# Altium PCB PCB1.PcbDoc
Units mm, origin at the board's own origin, x right, y up, seen from the top; angles counter-clockwise.
Board outline 35 x 65 mm, 2 copper layers (Top Layer, Bottom Layer), stack 1.534 mm thick; 24 components, 19 nets, 118 pads, 132 vias.
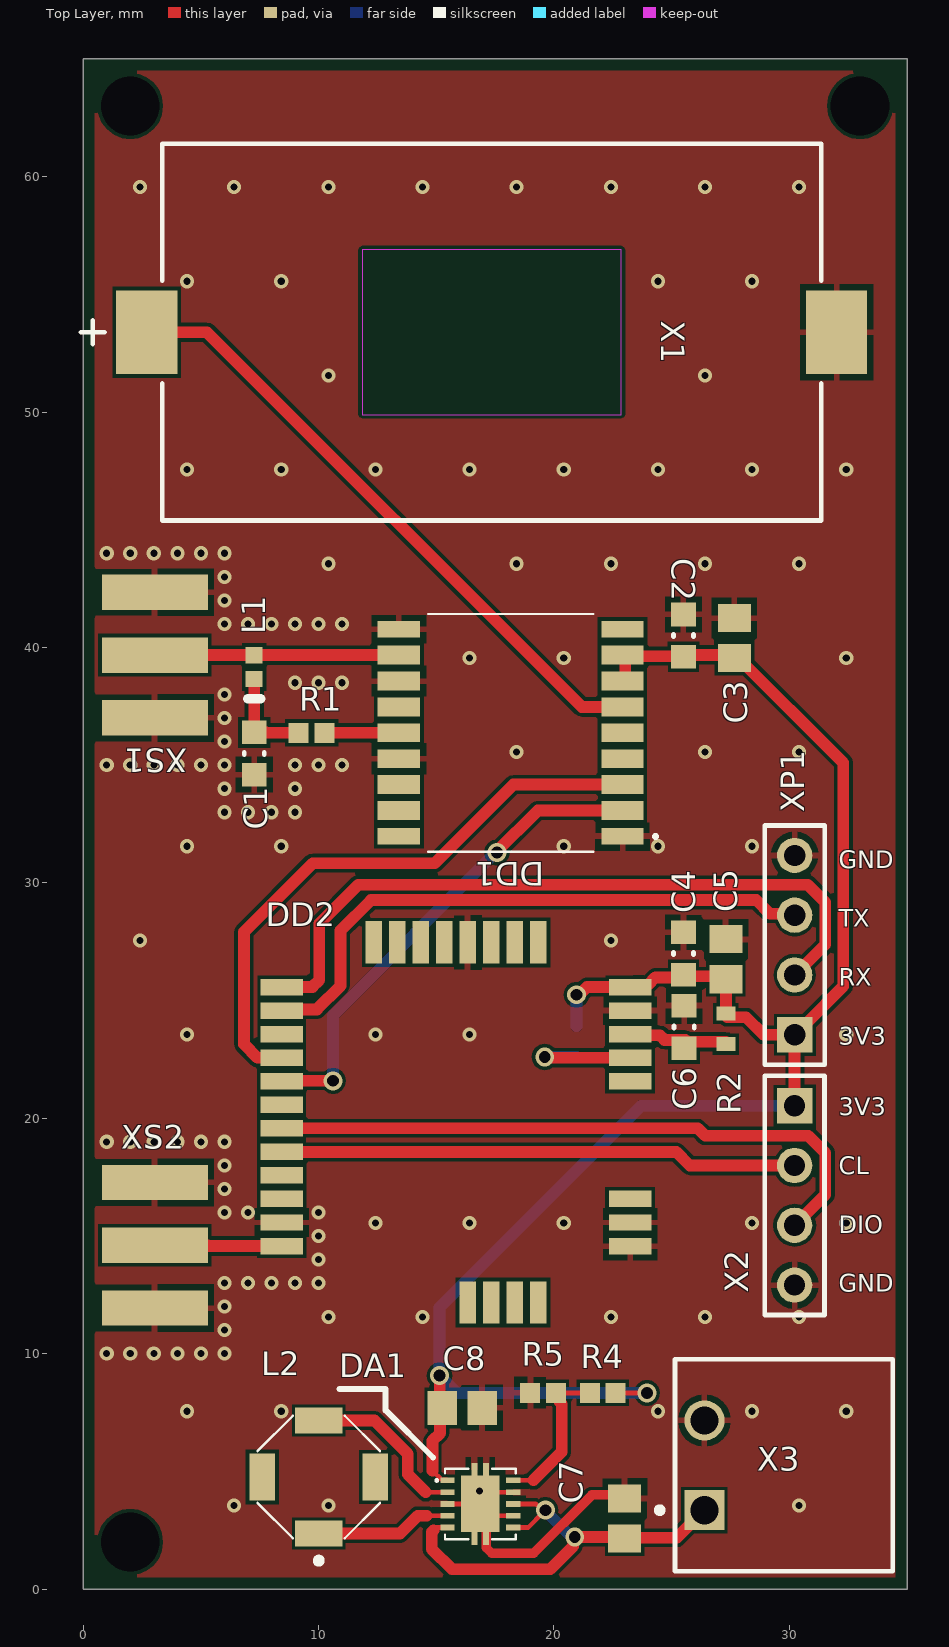
[diagram p0: Top Layer view]
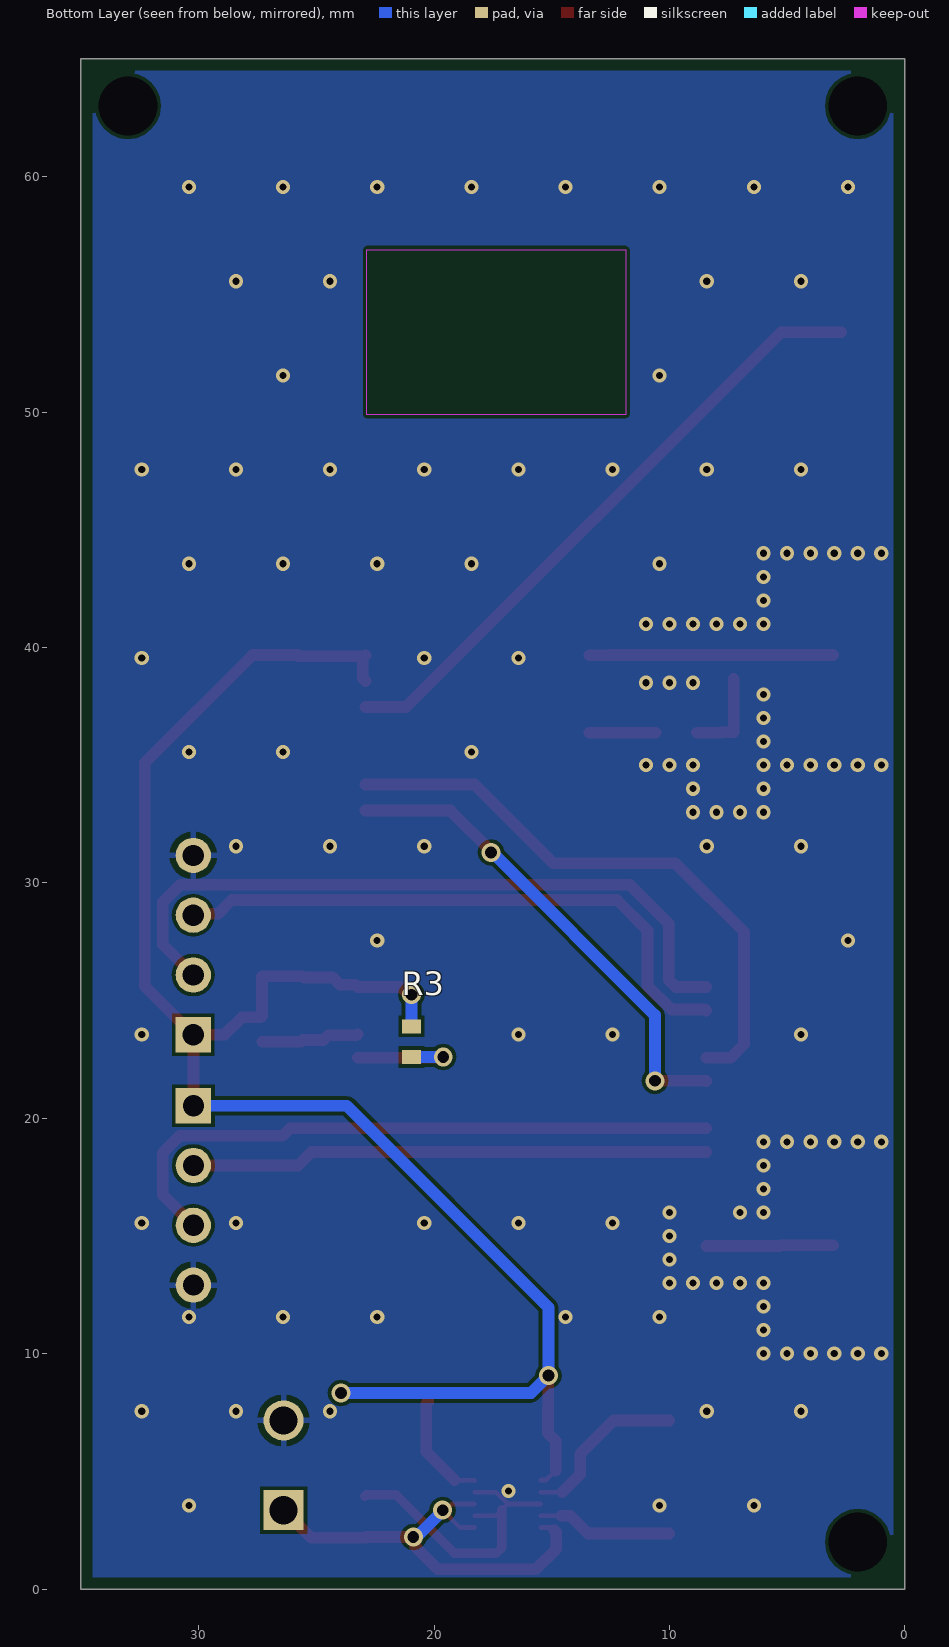
[diagram p1: Bottom Layer view, seen from below]
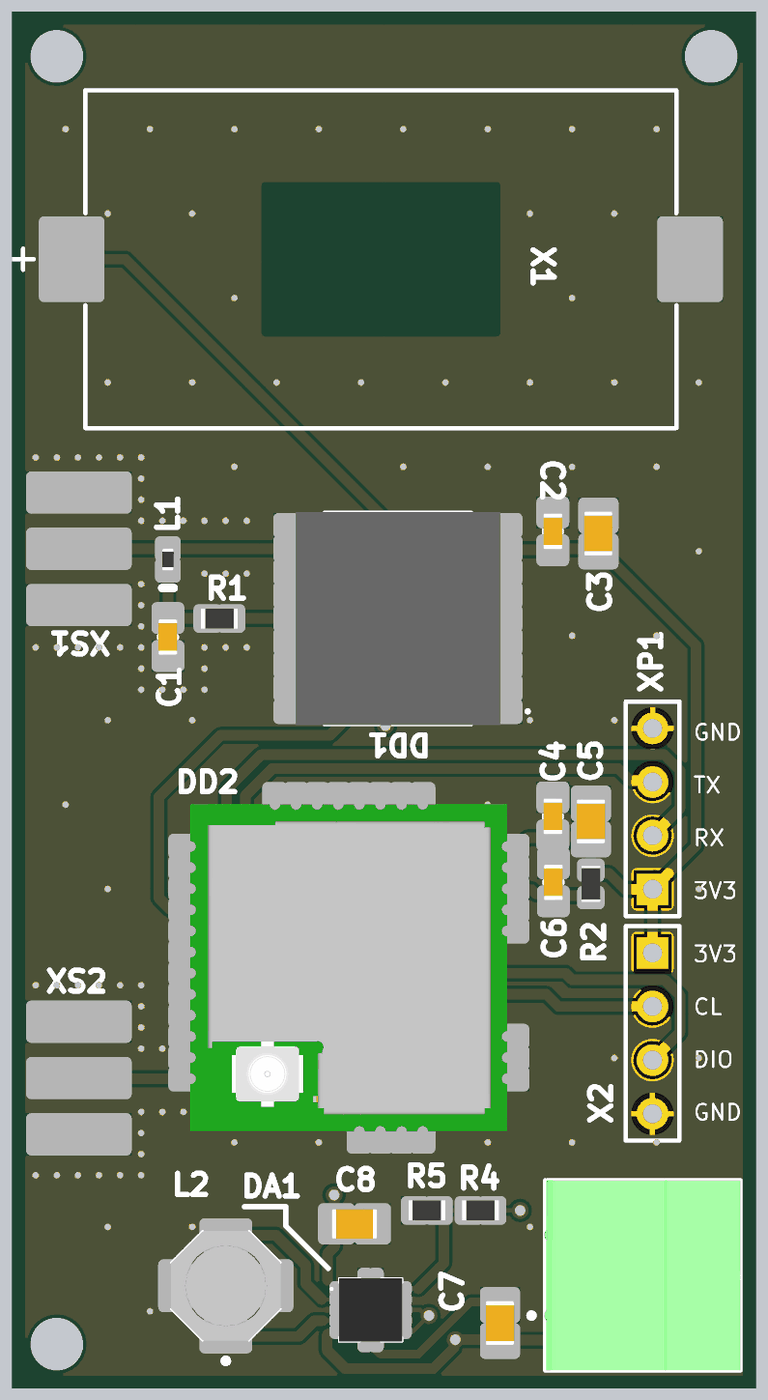
[diagram p2: 3D render of the assembled board from above, using the file's embedded part models]

## Layer stack, top to bottom
Top Solder: solder mask 0.0127, Solder Resist, Dk 3.3
Top Layer: signal copper 0.0178
Dielectric1: core 1.4986, FR-4, Dk 4.3
Bottom Layer: signal copper 0.0178
Bottom Solder: solder mask 0.0127, Solder Resist, Dk 3.3

## Board outline
0,0 35,0 35,65 0,65

## Design rules (kind name [scope] priority, off if disabled: settings)
Clearance [All] p1: gap=0.15 ignorepadtopadclearanceinfootprint=FALSE
ComponentClearance [All] p1: gap=0.25 collisioncheckmode=3 verticalgap=0.25 showdistances=FALSE
DiffPairsRouting [All] p1: maxlimit=0.25 minlimit=0.15 mostfreqgap=0.25 toplayer_minwidth=0.15 toplayer_maxwidth=0.254 toplayer_prefwidth=0.254 bottomlayer_minwidth=0.15 bottomlayer_maxwidth=0.254 bottomlayer_prefwidth=0.254 maxuncoupledlength=12.7
HoleSize [All] p1: absolutevalues=TRUE maxlimit=8 minlimit=0.3 maxpercent=80.000 minpercent=20.000
MinimumAnnularRing [All] p1: minimumring=0.254
PasteMaskExpansion [All] p1: expansion=0.254
PlaneClearance [All] p1: clearance=0.381
PlaneConnect [All] p1: pad.planeconnectstyle=Relief pad.reliefexpansion=0.508 pad.reliefentries=4 pad.reliefconductorwidth=0.254 pad.reliefairgap=0.254 via.planeconnectstyle=Direct via.reliefexpansion=0.508 via.reliefentries=4 via.reliefconductorwidth=0.254 via.reliefairgap=0.254
PolygonConnect [All] p1: thpad.connectstyle=Relief thpad.reliefconductorwidth=0.254 thpad.reliefentries=4 thpad.polygonreliefangle="90 Angle" thpad.airgapwidth=0.254 smdpad.connectstyle=Relief smdpad.reliefconductorwidth=0.254 smdpad.reliefentries=4 smdpad.polygonreliefangle="90 Angle" smdpad.airgapwidth=0.254 via.connectstyle=Direct via.reliefconductorwidth=0.254 via.reliefentries=4 via.polygonreliefangle="90 Angle" via.airgapwidth=0.254
RoomDefinition Sheet1 [InComponentClass('Sheet1')] p1: confinementstyle=ConfineIn formatcopy=TRUE lockcomponents=FALSE outline 0,0 35,0 35,65 0,65
RoutingCorners [All] p1: cornerstyle=45-Degree minsetback=2.5 maxsetback=2.5
RoutingVias [All] p1: holewidth=0.3 width=0.6 viastyle="Through Hole" minholewidth=0.3 minwidth=0.6 maxholewidth=0.5 maxwidth=0.8
SMDEntry [All] p1: side=TRUE corner=FALSE anyangle=FALSE
SMDNeckDown [All] p1: percent=100.000
SilkToSilkClearance [All] p1: silktosilkclearance=0.15
SilkToSolderMaskClearance SilkscreenOverComponentPads [IsPad] p1: minsilkscreentomaskgap=0.254 clearancetoexposedcopper=TRUE
SolderMaskExpansion [All] p1: expansion=0.254 istentingtop=FALSE
Width [All] p1: maxlimit=1 minlimit=0.15 preferedwidth=0.25 minimp=50.000000 maximp=50.000000 favimp=50.000000
21 further rules are at their usual default settings.

## Components (designator, comment, footprint, x,y, rotation, side; value= is the part's Value field where it differs from the comment)
C1 "GCM188R71H103KA37D" CAPC1608X09N 7.264,35.495 r270 top value=10nF
C2 "GCM188R71H104KA57D" CAPC1608X09N 25.5,40.5 r90 top value=100nF
C3 "CL21Y106KPQVPNE" CAPC2013X135X45NL10T25 27.661,40.4 r270 top value=10µF
C4 "GCM188R71H104KA57D" CAPC1608X09N 25.5,27 r270 top value=100nF
C5 "CL21Y106KPQVPNE" CAPC2013X135X45NL10T25 27.305,26.76 r270 top value=10µF
C6 "GCM188R71H104KA57D" CAPC1608X09N 25.527,23.875 r270 top value=100nF
C7 "CL21Y106KPQVPNE" CAPC2013X135X45NL10T25 23,3 r270 top value=10µF
C8 "C2012X5R1C226K125AC" CAPC2013X140X45NL15T25 16.104,7.696 r180 top value=22µF
DA1 "TPS63000IDRCRQ1" TPS63002DRCR 16.869,3.616 r0 top
DD1 "MAX-M8C-0" MAXM8C0 18.161,36.373 r0 top
DD2 "RAK3172(H)" RAK3172(H)-Footprint-1 23.336,12.072 r90 top
L1 "LQW15AN27NG00D" INDC1005X55X25ML5T10 7.264,39.168 r90 top value=27nH
L2 "SRU5018-3R5Y" SRU5018680Y 10.008,4.762 r270 top value=3.5µH
R1 "SG73P1JTTD100J" RESC1608X95X40LL15T20 9.703,36.373 r0 top value=10
R2 "RMCF0603FT10K0" RESC1608X55X25LL10T15 27.3,23.8 r90 top
R3 "RMCF0603ZT0R00" RESC1608X55X25LL10T15 20.955,23.256 r90 bottom value=0
R4 "RMCF0603JT1M00" RESC1608X95X40LL15T20 22.073,8.331 r0 top value=1M
R5 "ERJ-3EKF1783V" RESC1608X95X40LL15T20 19.533,8.331 r0 top value=178k
X1 "BA2032SM" MPD-BA2032SM_V 17.354,53.391 r0 top
X2 "ST-LINK-SWD-CONNECTOR" 20021311-00010T4LF-Footprint-1 30.222,20.533 r270 top
X3 "1803277" PHOE-1803277_V 26.391,5.258 r90 top
XP1 "61300411121" 20021311-00010T4LF-Footprint-1 30.226,23.546 r90 top
XS1 "CON-SMA-EDGE-S" RFSOLUTIONS_CON-SMA-EDGE-S 3.048,39.675 r90 top
XS2 "CON-SMA-EDGE-S" RFSOLUTIONS_CON-SMA-EDGE-S 3.048,14.605 r90 top

## Footprints (in the part's own frame and the unit in brackets; to place one, negate y for a bottom-side part, rotate by r counter-clockwise, add the part's x,y. Pads: shape width x height; smd on the part's side, far side on the other; paste and mask are expansions set on the pad)
20021311-00010T4LF-Footprint-1 [mm]
  rect 1.5x1.5 hole 0.9: 1(0,0)
  round 1.5 hole 0.9: 2(2.54,0) 3(5.08,0) 4(7.62,0)
  silkscreen extent -1.27,-1.27 8.89,1.27
CAPC1608X09N [mm] "Chip Capacitor, 2-Leads, Body 1,60x0,80mm, IPC Medium Density"
  rect 1x1.05 smd: 1(-0.9,0) 2(0.9,0)
  silkscreen extent -0.05,-0.43 0.05,0.43, body extent -0.85,-0.45 0.85,0.45, height 0.9
CAPC2013X135X45NL10T25 [mm] "Chip Capacitor, 2-Leads, Body 2.10x1.35mm, IPC Medium Density"
  rect 1.2x1.4 smd: 1(-0.85,0) 2(0.85,0)
  body extent -1.05,-0.67 1.05,0.67, height 1.35
CAPC2013X140X45NL15T25 [mm] "Chip Capacitor, 2-Leads, Body 2.15x1.4mm, IPC Medium Density"
  rect 1.25x1.45 smd: 1(-0.85,0) 2(0.85,0)
  body extent -1.07,-0.7 1.08,0.7, height 1.4
INDC1005X55X25ML5T10 [mm] "Chip Inductor, 2-Leads, Body 1.05x0.55mm, IPC Low Density"
  rect 0.69x0.72 smd: 1(-0.505,0) 2(0.505,0)
  silkscreen extent -1.35,-0.28 -1.35,0.28, body extent -0.53,-0.28 0.53,0.28, height 0.55
MAXM8C0 [mm]
  rect 1.8x0.7 smd: 1(4.75,-4.4) 9(4.75,4.4) 10(-4.75,4.4) 18(-4.75,-4.4)
  rect 1.8x0.8 smd: 2(4.75,-3.3) 3(4.75,-2.2) 4(4.75,-1.1) 5(4.75,0) 6(4.75,1.1) 7(4.75,2.2) 8(4.75,3.3) 11(-4.75,3.3) 12(-4.75,2.2) 13(-4.75,1.1) 14(-4.75,0) 15(-4.75,-1.1) 16(-4.75,-2.2) 17(-4.75,-3.3)
  silkscreen extent -3.5,-5.05 6.2,5.05, body extent -4.85,-5.05 4.85,5.05, height 2.8
MPD-BA2032SM_V [mm] "Coin Cell Holder, 2-Leads, Body 28x16mm"
  rect 2.6x3.56 smd: 1(-14.65,0) 2(14.65,0)
  Keep-Out Layer region: -5.5,-3.5 5.5,-3.5 5.5,3.5 -5.5,3.5
  silkscreen extent -17.45,-8 14,8, body extent -14,-8 14,8, height 6.7
PHOE-1803277_V [mm] "CONN, Body 9.2x9.01mm, Pitch 3.81mm"
  rect 1.7x1.7 hole 1.2: 1(-1.905,0)
  round 1.7 hole 1.2: 2(1.905,0)
  silkscreen extent -4.5,-8 4.5,2.02, body extent -4.51,-8 4.5,1.3, height 7.25
RAK3172(H)-Footprint-1 [mm]
  rect 0.7x1.8 smd: 1(13.5,14.9) 2(12.5,14.9) 3(11.5,14.9) 4(10.5,14.9) 5(9.5,14.9) 6(8.5,14.9) 7(7.5,14.9) 8(6.5,14.9) 9(5.5,14.9) 10(4.5,14.9) 11(3.5,14.9) 12(2.5,14.9) 17(2.5,0.1) 18(3.5,0.1) 19(4.5,0.1) 20(9.5,0.1) 21(10.5,0.1) 22(11.5,0.1) 23(12.5,0.1) 24(13.5,0.1)
  rect 1.8x0.7 smd: 13(0.1,7) 14(0.1,6) 15(0.1,5) 16(0.1,4) 25(15.4,4) 26(15.4,5) 27(15.4,6) 28(15.4,7) 29(15.4,8) 30(15.4,9) 31(15.4,10) 32(15.4,11)
  body extent 0,0 15.5,15, height 3.5
RESC1608X55X25LL10T15 [mm] "Chip Resistor, 2-Leads, Body 1.70x0.90mm, IPC High Density"
  rect 0.6x0.8 smd: 1(-0.65,0) 2(0.65,0)
  body extent -0.85,-0.45 0.85,0.45, height 0.55
RESC1608X95X40LL15T20 [mm] "Chip Resistor, 2-Leads, Body 1.75x0.95mm, IPC High Density"
  rect 0.85x0.85 smd: 1(-0.55,0) 2(0.55,0)
  body extent -0.87,-0.48 0.87,0.48, height 0.95
RFSOLUTIONS_CON-SMA-EDGE-S [mm] "CONN SMA JACK STR EDGE MNT"
  rect 1.5x4.5 smd: 1(0,0) 2(-2.667,0) 2(2.667,0)
  body extent -3.18,-1.52 3.17,11.63, height 3.55
SRU5018680Y [mm]
  rect 1.1x2 smd: 1(2.4,0) 2(-2.4,0)
  rect 2x1.1 smd: 3(0,-2.4) 4(0,2.4)
  silkscreen extent -2.6,-2.6 3.68,2.6, body extent -2.6,-2.6 2.6,2.6, height 1.8
TPS63002DRCR [mm]
  rect 0.6x0.24 smd: 1(-1.4,1) 2(-1.4,0.5) 3(-1.4,0) 4(-1.4,-0.5) 5(-1.4,-1) 6(1.4,-1) 7(1.4,-0.5) 8(1.4,0) 9(1.4,0.5) 10(1.4,1)
  rect 1.65x2.4 smd: 11(0,0)
  rect 0.25x0.6 smd: 12(0.25,1.45) 13(-0.25,1.45) 14(0.25,-1.45) 15(-0.25,-1.45)
  silkscreen extent -1.9,-1.5 1.5,1.5, body extent -1.5,-1.5 1.5,1.5, height 1

## Part data
C1: library part CMP-001-00124-4, "CAP CER 10000PF 50V X7R 0603", Case Code (Metric)=1608, Case/Package=0603, Dielectric=X7R, Manufacturer=Murata, Max Operating Temperature=125°C, Min Operating Temperature=-55°C, Package Quantity=1, Ratings=AEC-Q200, Tolerance=10%, Voltage=50V, ComponentLink1Description=https://datasheet.ciiva.com/16624/product-16624561.pdf?src-supplier=Avnet+Europe, ComponentLink1URL=https://datasheet.ciiva.com/16624/product-16624561.pdf?src-supplier=Avnet+Europe, ComponentLink2Description=https://datasheet.ciiva.com/132/product-132006.pdf?src-supplier=Digi-Key, ComponentLink2URL=https://datasheet.ciiva.com/132/product-132006.pdf?src-supplier=Digi-Key, ComponentLink3Description=https://datasheet.ciiva.com/11789/0900766b80ef92d0-11789046.pdf?src-supplier=RSComponents, ComponentLink3URL=https://datasheet.ciiva.com/11789/0900766b80ef92d0-11789046.pdf?src-supplier=RSComponents, ComponentLink4Description=https://datasheet.ciiva.com/18183/getdatasheetpartid-178897-18183622.pdf?src-supplier=Verical, ComponentLink4URL=https://datasheet.ciiva.com/18183/getdatasheetpartid-178897-18183622.pdf?src-supplier=Verical, ComponentLink5Description=https://datasheet.ciiva.com/132/product-132007.pdf?src-supplier=Digi-Key, ComponentLink5URL=https://datasheet.ciiva.com/132/product-132007.pdf?src-supplier=Digi-Key, ComponentLink6Description=https://datasheet.ciiva.com/16213/s0717e-16213899.pdf?src-supplier=Future+Electronics, ComponentLink6URL=https://datasheet.ciiva.com/16213/s0717e-16213899.pdf?src-supplier=Future+Electronics, Construction=Flat, Depth=0.8mm, Design Item ID=1_7, Height=0.8mm, Lead Free="Lead Free", Length=1.6mm, Lybrary Path=Capacitors.SchLib, Manufacturer Part Number=GCM188R71H103KA37D, Mount="Surface Mount", Packaging="Tape and Reel", Pricing 1="1=0,17000, 10=0,11900, 50=0,06740, 100=0,05580, 500=0,03912, 1000=0,03239 (USD)", Radiation Hardening=No, REACH SVHC="No SVHC", RoHS=Yes, RoHS Compliant=Yes, Series=GCM, Source=Meteo_1.SCHLIB, Stock 1=4826468, Termination=SMD/SMT, Thickness=0.035inch, Voltage Rating=50V, Voltage Rating (DC)=50V, Width=0.031inch
C2 C4 C6: library part CMP-001-00128-5, "CAP CER 0.1UF 50V X7R 0603", Case Code (Metric)=1608, Case/Package=0603, Color=Grey, Dielectric=X7R, Manufacturer=Murata, Max Operating Temperature=125°C, Min Operating Temperature=-55°C, Package Quantity=1, Ratings=AEC-Q200, Tolerance=10%, Voltage=50V, Approvals=CSA,UR, ComponentLink1Description=https://datasheet.ciiva.com/16624/product-16624562.pdf?src-supplier=Avnet+Europe, ComponentLink1URL=https://datasheet.ciiva.com/16624/product-16624562.pdf?src-supplier=Avnet+Europe, ComponentLink2Description=https://datasheet.ciiva.com/133/product-133574.pdf?src-supplier=Digi-Key, ComponentLink2URL=https://datasheet.ciiva.com/133/product-133574.pdf?src-supplier=Digi-Key, ComponentLink3Description=https://datasheet.ciiva.com/133/product-133575.pdf?src-supplier=Digi-Key, ComponentLink3URL=https://datasheet.ciiva.com/133/product-133575.pdf?src-supplier=Digi-Key, ComponentLink4Description=https://datasheet.ciiva.com/18183/getdatasheetpartid-98693-18183626.pdf?src-supplier=Verical, ComponentLink4URL=https://datasheet.ciiva.com/18183/getdatasheetpartid-98693-18183626.pdf?src-supplier=Verical, ComponentLink5Description=https://datasheet.ciiva.com/11786/0900766b80ef92d0-11786863.pdf?src-supplier=RSComponents, ComponentLink5URL=https://datasheet.ciiva.com/11786/0900766b80ef92d0-11786863.pdf?src-supplier=RSComponents, ComponentLink6Description=https://datasheet.ciiva.com/133/product-133573.pdf?src-supplier=Digi-Key, ComponentLink6URL=https://datasheet.ciiva.com/133/product-133573.pdf?src-supplier=Digi-Key, ComponentLink7Description=https://datasheet.ciiva.com/2989/product-2989242.pdf?src-supplier=Avnet, ComponentLink7URL=https://datasheet.ciiva.com/2989/product-2989242.pdf?src-supplier=Avnet, ComponentLink8Description=https://datasheet.ciiva.com/16497/product-16497247.pdf?src-supplier=Future+Electronics, ComponentLink8URL=https://datasheet.ciiva.com/16497/product-16497247.pdf?src-supplier=Future+Electronics, Construction=Flat, Depth=0.8mm, Design Item ID=1_16, Height=0.8mm, Lead Free="Lead Free", Length=1.6mm, Manufacturer Part Number=GCM188R71H104KA57D, Mount="Surface Mount", Packaging="Tape and Reel", Pricing 1="1=0,11000, 10=0,07900, 50=0,04280, 100=0,03500, 500=0,02502, 1000=0,01966 (USD)", Radiation Hardening=No, REACH SVHC="No SVHC", RoHS=Yes, RoHS Compliant=Yes, Series=GCM, Source=Meteo_1.SCHLIB, Stock 1=4755830, Termination=SMD/SMT, Thickness=0.035inch, Voltage Rating=50V, Voltage Rating (DC)=50V, Width=0.031inch
C3 C5 C7: library part CMP-001-00143-4, "CAP CER 10UF 10V X7S 0805", Capacitance=10µF, Case Code (Imperial)=0805, Case Code (Metric)=2012, Manufacturer=Samsung, Max Operating Temperature=125°C, Min Operating Temperature=-55°C, Ratings=AEC-Q200, Tolerance=10%, Voltage Rating=10V, Case/Package=0805, Features="Soft Termination", Lead Free="Lead Free", Length=0.079inch, Manufacturer Part Number=CL21Y106KPQVPNE, Mount="Surface Mount", Packaging="Tape and Reel", RoHS Compliant=Yes, Thickness=0.055inch, Width=0.049inch
C8: library part CMP-001-00144-1, "TDK - C2012X5R1C226K125AC - SMD Multilayer Ceramic Capacitor, 22 µF, 16 V, 0805 [2012 Metric], ± 10%, X5R, C Series", Capacitance=22uF, Case Code (Imperial)=0805, Case Code (Metric)=2012, Dielectric=X5R, Dielectric Material=Ceramic, Manufacturer=TDK, Max Operating Temperature=85°C, Min Operating Temperature=-55°C, Package Quantity=1, Tolerance=10%, Voltage=16V, Case/Package=0805, Construction=Flat, Depth=1.25mm, Height=1.25mm, Lead Free="Lead Free", Length=2mm, Manufacturer Part Number=C2012X5R1C226K125AC, Mount="Surface Mount", Number of Pins=2, Packaging="Tape and Reel", REACH SVHC="No SVHC", Resistor Type=Ceramic, RoHS Compliant=Yes, Series=C, Termination=Wraparound, Thickness=0.057inch, Voltage Rating=16V, Voltage Rating (DC)=16V, Weight=0.000194oz, Width=0.049inch
DA1: library part CMP-031-00015-3, "IC REG BUCK BOOST ADJ 1.6A 10SON", Case/Package=VSON, Manufacturer="Texas Instruments", Manufacturer Part Number=TPS63000DRCR, Max Input Voltage=5.5V, Max Operating Temperature=85°C, Max Output Current=1.2A, Min Input Voltage=1.8V, Min Operating Temperature=-40°C, Min Output Voltage=1.2V, Output Current=1.6A, Package Quantity=1, Quiescent Current=40uA, Switching Frequency=1.5MHz, Contact Plating=Gold, Efficiency=96%, Lead Free="Lead Free", Max Output Voltage=5.5V, Number of Outputs=1, Number of Pins=10, Operating Supply Voltage=5.5V, Output Configuration=Positive, Output Type=Adjustable, Output Voltage=5.5V, Packaging="Tape and Reel", RoHS Compliant=Yes, Series="Automotive, AEC-Q100", Synchronous Rectifier=Yes, Topology=Buck-Boost, Weight=0.000921oz, Width=3mm
DD1: library part CMP-021-00007-2, "IC Receiver Gps/gnss 18LCC", Manufacturer=u-blox, Manufacturer Part Number=MAX-M8C-0, RoHS Compliant=Yes
DD2: library part CMP-00025-00003-1, "RAK3172 WisDuo LPWAN Module", Manufacturer="RAK Wireless", Manufacturer Part Number=RAK3172(H)
L1: library part CMP-006-00036-2, "INDUCTOR", Case Code (Imperial)=0402, Case Code (Metric)=1005, Current=260mA, Current Rating=280mA, DC Resistance (DCR)=520mR, Inductance=27nH, Inductance Tolerance=2%, Manufacturer=Murata, Max Operating Temperature=125°C, Min Operating Temperature=-55°C, Package Quantity=1, Self Resonant Frequency=3.5GHz, Test Frequency=100MHz, Case/Package=0402, Core Material=Air,Ferrite, DC Current=280mA, Depth=0.6mm, Height=0.5mm, Lead Free="Lead Free", Length=1mm, Manufacturer Part Number=LQW15AN27NG00D, Max DC Current=280mA, Military Standard=Not, Mount="Surface Mount", Number of Pins=2, Packaging="Tape and Reel", Q Factor=25, Radiation Hardening=No, REACH SVHC="No SVHC", RoHS Compliant=Yes, Shielding=Unshielded, Termination=SMD/SMT, Tolerance=2%, Weight=2.8E-05oz, Width=0.5mm
L2: library part CMP-006-00039-2, "Ind Power Shielded Wirewound 3.5uH 30% 100KHz 9Q-Factor Ferrite 2.1A T/R", Case/Package=5018, Current Rating=2.1A, DC Resistance (DCR)=32mR, Inductance=3.5uH, Manufacturer=Bourns, Max Operating Temperature=125°C, Min Operating Temperature=-40°C, Package Quantity=1000, Saturation Current=1.7A, Self Resonant Frequency=90MHz, Test Frequency=100kHz, Tolerance=30%, Core Material=Ferrite, DC Current=2.1A, Depth=5.4mm, Height=1.8mm, Length=5.2mm, Manufacturer Part Number=SRU5018-3R5Y, Max DC Current=2.1A, Military Standard=Not, Mount="Surface Mount", Number of Pins=2, Packaging="Tape and Reel", Q Factor=9, RoHS Compliant=Yes, Series=SRU5018, Shielding=Shielded, Termination=SMD/SMT, Width=0.205inch
R1: library part CMP-00014-1, "Thick Film Resistors - SMD 0.2W 10ohm 5% 100ppm Anti-Pulse", Case Code (Imperial)=0603, Case Code (Metric)=1608, Max Operating Temperature=155°C, Min Operating Temperature=-55°C, Power Rating=200mW, Resistance=10, Resistor Type="Thick Film", Temperature Coefficient=100ppm/°C, Tolerance=5%, Voltage Rating=50V, Case/Package=0603, Component Comment="10 200mW", Height=0.45mm, Length=1.6mm, Packaging="Tape and Reel", RoHS Compliant=Yes, Series=SG73, Termination=SMD/SMT, Voltage Rating (DC)=50V, Weight=7.1E-05oz, Width=0.8mm
R2: library part CMP-009-00252-4, "RES SMD 10K OHM 1% 1/10W 0603", Case Code (Imperial)=0603, Case Code (Metric)=1608, Manufacturer="Stackpole Electronics Inc", Max Operating Temperature=155°C, Max Power Dissipation=100mW, Min Operating Temperature=-55°C, Resistance=10k, Resistor Type="Thick Film", Temperature Coefficient=100ppm/°C, Tolerance=1%, Voltage Rating=75V, Case/Package=0603, Component Comment="10k 100mW", Construction=Rectangular, Contact Plating=Tin,Matte, Depth=0.8mm, Features="Automotive AEC-Q200", Height=0.022inch, Lead Free="Lead Free", Length=1.55mm, Manufacturer Part Number=RMCF0603FT10K0, Military Standard=Not, Mount="Surface Mount", Number of Terminations=2, Packaging="Tape and Reel", Pins=2, Power Rating=100mW, Radiation Hardening=No, RoHS Compliant=Yes, Series=RMCF, Size Code=0603, Width=0.031inch
R3: library part CMP-009-00251-4, "Res Thkflm 0603 0 Ohm Jumper 1/10W 100Ppm/ C Smd Rohs Compliant: Yes", Case Code (Imperial)=0603, Case Code (Metric)=1608, Current Rating=1A, Manufacturer="Stackpole Electronics Inc", Max Operating Temperature=155°C, Max Power Dissipation=100mW, Min Operating Temperature=-55°C, Resistance=0, Resistor Type="Thick Film", Working Voltage=75V, Case/Package=0603, Component Comment="0 100mW", Construction=Rectangular, Contact Plating=Tin,Matte, Depth=0.8mm, Features="Automotive AEC-Q200", Height=0.022inch, Lead Free="Lead Free", Length=1.55mm, Manufacturer Part Number=RMCF0603ZT0R00, Military Standard=Not, Mount="Surface Mount", Number of Terminations=2, Packaging="Tape and Reel", Power Rating=100mW, Radiation Hardening=No, RoHS Compliant=Yes, Series=RMCF, Width=0.031inch
R4: library part CMP-00024-2, "RES 1M OHM 5% 1/10W 0603", Case Code (Imperial)=0603, Case Code (Metric)=1608, Manufacturer="Stackpole Electronics", Max Operating Temperature=155°C, Max Power Dissipation=100mW, Min Operating Temperature=-55°C, Resistance=1M, Resistor Type="Thick Film", Temperature Coefficient=200ppm/°C, Tolerance=5%, Working Voltage=75V, Case/Package=0603, Component Comment="1M 100mW", Construction=Rectangular, Contact Plating=Tin,Matte, Depth=0.8mm, Features="Automotive AEC-Q200", Height=0.022inch, Lead Free="Lead Free", Length=1.55mm, Manufacturer Part Number=RMCF0603JT1M00, Military Standard=Not, Mount="Surface Mount", Number of Terminations=2, Packaging="Tape and Reel", Power Rating=100mW, Radiation Hardening=No, RoHS Compliant=Yes, Series=RMCF, Technology="THICK FILM", Width=0.031inch
R5: library part CMP-00025-2, "ICK FILM, RESISTOR, 178KOHM, 100mW, ±1%; Product Range:PANASONIC - ERJ Series; Resistance:178kohm; Power Rating:100mW; Resistance Tolerance:± 1%; Resistor Case Style:0603 ^1608 Metric]; Resistor Element Type:Thick Film; MSL:-", Case Code (Imperial)=0603, Case Code (Metric)=1608, Manufacturer=Panasonic, Max Operating Temperature=155°C, Max Power Dissipation=100mW, Min Operating Temperature=-55°C, Package Quantity=1, Resistance=178k, Resistance Tolerance=1%, Resistor Type="Thick Film", Temperature Coefficient=100ppm/°C, Voltage Rating=75V, Voltage Rating (DC)=50V, Case/Package=0603, Component Comment="178k 100mW", Construction=Rectangular, Contact Plating=Tin, Depth=0.8mm, Features="Automotive AEC-Q200", Height=0.45mm, Lead Free="Lead Free", Length=1.6mm, Manufacturer Part Number=ERJ-3EKF1783V, Military Standard=Not, Mount="Surface Mount", Number of Terminations=2, Packaging="Tape and Reel", Power Rating=100mW, REACH SVHC="No SVHC", RoHS Compliant=Yes, Series=ERJ, Technology="THICK FILM", Termination=SMD/SMT, Tolerance=1%, Width=0.8mm
X1: library part CMP-002-00003-10, "Battery Holder Coin 20MM SMD", Manufacturer="Memory Protection Devices", Max Operating Temperature=225°C, Min Operating Temperature=-40°C, Package Quantity=100, Case/Package=BA2032SM, Connector Type=BatteryHolder, Diameter=20mm, Lead Free="Lead Free", Manufacturer Part Number=BA2032SM, Mount="Surface Mount,PCB", Mounting Technology=SM, Number of Cells=1, Pins=2, RoHS Compliant=True, Series=-, Termination=SMD/SMT
X2: library part CMP-002-00091-3, "Conn Unshrouded Header HDR 4 POS 2.54mm Solder ST Thru-Hole Bag", Color=Black, Manufacturer="Würth Elektronik", Manufacturer Part Number=61300411121, Connector Type="Male Pin", Contact Material=Copper, Contact Mating Length=0.236inch, Contact Plating=Gold, Gender=Male, Lead Free="Lead Free", Mount="Through Hole", Number of Contacts=4, Number of Positions=4, Number of Rows=1, Packaging=Bulk, Pins=4, Pitch=0.1inch, Position=4, REACH SVHC=Unknown, RoHS Compliant=Yes, Termination=Solder
X3: library part CMP-002-00014-7, "Male Header, Pitch 3.81 mm, 1 x 2 Position, Height 7.25 mm, Tail Length 3.4 mm, RoHS, Bulk", Colour=Green, Current Rating=8A, Manufacturer="Phoenix Contact", Package Description="Male Header, Pitch 3.81 mm, 1 x 2 Position, Height 7.25 mm, Tail Length 3.4 mm", Package Quantity=50, Voltage Rating=160V, Case/Package=1803277, Connector Type=Header, Contact Plating=Tin, Datasheet URL=https://datasheet.ciiva.com/16096/1803277-16096845.pdf, Datasheet Version=Feb-14, Diameter=7.25mm, Gender=Male, Lead Pitch=0.15inch, Manufacturer Part Number=1803277, Mounting Technology=TH, Package Reference=1803277, Packaging=Bulk, Pins=2, RoHS Compliant=True, Rows=1
XP1: library part CMP-002-00092-3, "Conn Unshrouded Header HDR 4 POS 2.54mm Solder ST Thru-Hole Bag", Color=Black, Manufacturer="Würth Elektronik", Connector Type="Male Pin", Contact Material=Copper, Contact Mating Length=0.236inch, Contact Plating=Gold, Gender=Male, Lead Free="Lead Free", Manufacturer Part Number=61300411121, Mount="Through Hole", Number of Contacts=4, Number of Positions=4, Number of Rows=1, Packaging=Bulk, Pins=4, Pitch=0.1inch, Position=4, REACH SVHC=Unknown, RoHS Compliant=Yes, Termination=Solder
XS1 XS2: library part CMP-002-00086-2, "CONN SMA JACK STR EDGE MNT", Case/Package=SMA, Manufacturer="RF Solutions", Package Quantity=1, Connector Type=SMA,Socket, Fastening Type=Threaded, Manufacturer Part Number=CON-SMA-EDGE-S, Mount=Edge, Number of Ports=1, Pins=3, Termination=Solder

## Free pads (board coordinates)
  round 0.5 hole 2.5 unplated: 1(2,2) 2(33,63) 3(2,63)

## Via types
v1: diameter 0.6, hole 0.3, Top Layer to Bottom Layer, tented both sides, 124 vias
v2: diameter 0.8, hole 0.5, Top Layer to Bottom Layer, tented both sides, 8 vias

## Nets (pads, with @x,y where several pads share a name; then routed paths per layer and width w, separated by ;. In a path a pad name is that pad's centre, name@x,y a point inside that pad or via, vN(x,y) a via of type N, cw(c..) or ccw(c..) an arc to the next point about the centre after c; other vN are vias at no path point)
3.3V: C2.1 C3.2 C4.2 C5.2 C8.2 DA1.1 DD1.7 DD1.8 DD2.24 R2.2 R3.2 R4.2 X2.1 XP1.1 | length 77.8
  Top Layer w0.2: 14.834,5.029 15.227,4.636 15.449,4.636 DA1.1 ; R4.2 v2(23.952,8.331)
  Top Layer w0.5: 14.834,5.029 14.834,6.299 15.161,6.626 15.161,7.689 15.146,7.704 15.146,9.06 v2(15.138,9.068) ; v2(20.955,25.248) 21.012,25.305 21.131,25.305 21.398,25.572 DD2.24 23.336,25.672 23.996,25.672 24.309,25.985 25.527,25.985 25.577,26.035 27.305,26.035 27.305,24.35 27.36,24.295 28.156,24.295 28.905,23.546 XP1.1 ; DD1.7 23.028,38.69 23.028,39.556 DD1.8@22.959,39.625 ; DD1.8 DD1.8@22.959,39.625 ; X2.1 30.222,23.542 XP1.1 ; DD1.8@22.959,39.625 25.756,39.625 25.806,39.675 27.661,39.675 27.711,39.675 32.283,35.102 32.283,25.603 30.726,24.046 XP1.1
  Bottom Layer w0.5: R3.2 v2(20.955,25.248) ; v2(23.952,8.331) 15.875,8.331 v2(15.138,9.068) 15.138,11.963 23.708,20.533 X2.1
DD2_RST: C6.2 DD2.22 R2.1 | length 4.2
  Top Layer w0.5: DD2.22 23.283,23.525 24.5,23.525 24.696,23.329 25.576,23.329 25.655,23.25 R2.1@27.3,23.25
GND: C1.2 C2.2 C3.1 C4.1 C5.1 C6.1 C7.1 C8.1 DA1.3 DA1.7 DA1.9 DA1.11 DA1.12 DA1.13 DA1.14 DA1.15 DD1.1 DD1.10 DD1.12 DD1.15 DD2.11 DD2.17 DD2.18 DD2.23 DD2.28 R5.1 X1.2 X2.4 X3.2 XP1.4 XS1.2 XS2.2 | length 13.2
  Top Layer w0.2: DA1.3 DA1.11 ; DA1.7 17.369,3.116 17.119,3.366 DA1.11 ; DA1.9 17.369,4.116 DA1.11
  Top Layer w0.4: DA1.11@17.119,3.366 DA1.14 17.119,1.758 17.353,1.524 19.132,1.524 21.608,4 22.888,4 C7.1@22.944,3.944
  other v1: 6.414,3.554 10.414,3.554 30.414,3.554 16.84,4.166 4.414,7.554 8.414,7.554 24.414,7.554 28.414,7.554 32.414,7.554 1,10 2,10 3,10 4,10 5,10 6,10 6,11 10.414,11.554 14.414,11.554 22.414,11.554 26.414,11.554 30.414,11.554 6,12 6,13 7,13 8,13 9,13 10,13 10,14 10,15 12.414,15.554 16.414,15.554 20.414,15.554 28.414,15.554 32.414,15.554 6,16 7,16 10,16 6,17 6,18 1,19 2,19 3,19 4,19 5,19 6,19 4.414,23.554 12.414,23.554 16.414,23.554 32.414,23.554 2.414,27.554 22.414,27.554 4.414,31.554 8.414,31.554 20.414,31.554 24.414,31.554 28.414,31.554 6,33 7,33 8,33 9,33 6,34 9,34 1,35 2,35 3,35 4,35 5,35 6,35 9,35 10,35 11,35 18.414,35.554 26.414,35.554 30.414,35.554 6,36 6,37 6,38 9,38.5 10,38.5 11,38.5 16.414,39.554 20.414,39.554 32.414,39.554 6,41 7,41 8,41 9,41 10,41 11,41 6,42 6,43 10.414,43.554 18.414,43.554 22.414,43.554 26.414,43.554 30.414,43.554 1,44 2,44 3,44 4,44 5,44 6,44 4.414,47.554 8.414,47.554 12.414,47.554 16.414,47.554 20.414,47.554 24.414,47.554 28.414,47.554 32.414,47.554 10.414,51.554 26.414,51.554 4.414,55.554 8.414,55.554 24.414,55.554 28.414,55.554 2.414,59.554 6.414,59.554 10.414,59.554 14.414,59.554 18.414,59.554 22.414,59.554 26.414,59.554 30.414,59.554
GPS_RX: DD1.3 DD2.4 | length 25.3
  Top Layer w0.5: DD2.4 7.4,22.572 6.833,23.139 6.833,27.915 9.754,30.836 14.935,30.836 18.272,34.173 DD1.3
GPS_TX: DD1.2 DD2.5 | length 21
  Top Layer w0.5: DD2.5 8.436,21.59 v2(10.617,21.59) ; v2(17.577,31.293) 17.526,31.293 19.306,33.073 DD1.2
  Bottom Layer w0.5: v2(10.617,21.59) 10.617,24.384 17.526,31.293 v2(17.577,31.293)
NetC1_1: C1.1 L1.1 R1.1 | length 3.8
  Top Layer w0.5: L1.1 C1.1 7.789,36.395 7.811,36.373 R1.1@8.828,36.373
NetDA1_2: DA1.2 L2.2 | length 7.2
  Top Layer w0.2: 14.553,4.116 DA1.2
  Top Layer w0.5: L2.2 12.37,7.162 13.792,5.74 13.792,4.877 14.553,4.116
NetDA1_4: DA1.4 L2.1 | length 5.8
  Top Layer w0.2: 14.597,3.116 DA1.4
  Top Layer w0.5: L2.1 13.462,2.362 14.216,3.116 14.597,3.116
NetDA1_10: DA1.10 R4.1 R5.2 | length 6.6
  Top Layer w0.2: DA1.10 18.275,4.623 19.126,4.623 ; R5.2 20.332,8.331 R4.1
  Top Layer w0.5: 19.126,4.623 20.332,5.829 20.332,7.863 20.258,7.938 20.258,8.156 R5.2
NetDD1_6: DD1.6 X1.1 | length 26.8
  Top Layer w0.5: X1.1 5.258,53.391 21.176,37.473 DD1.6
NetDD1_11: DD1.11 L1.2 XS1.1 | length 10.4
  Top Layer w0.5: XS1.1 5.298,39.675 5.3,39.673 L1.2 12.511,39.673 ; DD1.11@12.511,39.673 DD1.11
NetDD1_14: DD1.14 R1.2 | length 2.8
  Top Layer w0.5: R1.2@10.578,36.373 DD1.14
NetDD2_12: DD2.12 XS2.1 | length 5.4
  Top Layer w0.5: XS2.1 5.298,14.605 5.331,14.572 DD2.12
NetDD2_21: DD2.21 R3.1 | length 5
  Top Layer w0.5: v2(19.609,22.606) 19.643,22.572 DD2.21
  Bottom Layer w0.5: v2(19.609,22.606) R3.1
RX: DD2.1 XP1.2 | length 30.2
  Top Layer w0.5: DD2.1 8.443,25.579 9.74,25.579 10.033,25.871 10.033,28.27 11.684,29.921 30.779,29.921 31.521,29.179 31.521,27.381 XP1.2
SWCLK: DD2.8 X2.2 | length 22
  Top Layer w0.5: DD2.8 25.192,18.572 25.771,17.993 X2.2
SWDIO: DD2.7 X2.3 | length 27.1
  Top Layer w0.5: DD2.7 26.103,19.572 26.422,19.253 30.797,19.253 31.521,18.529 31.521,16.753 X2.3
TX: DD2.2 XP1.3 | length 25.4
  Top Layer w0.5: DD2.2 8.485,24.621 9.928,24.621 10.934,25.627 10.934,27.977 12.228,29.271 28.59,29.271 29.17,28.691 30.161,28.691 XP1.3
VBAT: C7.2 DA1.5 DA1.6 DA1.8 X3.1 | length 20
  Top Layer w0.2: 14.884,2.499 15.002,2.616 DA1.5 ; DA1.6 18.898,2.616 19.519,3.238 19.519,3.328 19.45,3.398 v2@19.38,3.468 ; DA1.8 19.217,3.616 19.366,3.468 v2@19.38,3.468 ; v2(19.634,3.353) 19.589,3.398 19.519,3.468 v2@19.38,3.468
  Top Layer w0.5: 14.884,2.499 14.808,2.423 14.808,1.702 15.672,0.838 19.838,0.838 20.821,1.821 20.821,2.152 v2(20.879,2.21) 22.16,2.21 22.884,2.21 22.885,2.208 22.911,2.183 25.22,2.183 X3.1
  Bottom Layer w0.5: v2(19.634,3.353) 19.634,3.327 20.879,2.083 21.006,2.21 v2(20.879,2.21)
pads on no net: DD1.4 DD1.5 DD1.9 DD1.13 DD1.16 DD1.17 DD1.18 DD2.3 DD2.6 DD2.9 DD2.10 DD2.13 DD2.14 DD2.15 DD2.16 DD2.19 DD2.20 DD2.25 DD2.26 DD2.27 DD2.29 DD2.30 DD2.31 DD2.32 L2.3 L2.4

## Polygon pours and split planes (outlines as drawn)
GND on Bottom Layer "GND_L02_P000" (solid, pour order 0): 0.5,0.5 34.5,0.5 34.5,64.5 0.5,64.5
GND on Top Layer "GND_L01_P001" (solid, pour order 1): 0.5,0.5 34.5,0.5 34.5,64.5 0.5,64.5

## Silkscreen, mask and mechanical layers (free items; w line width, h text height)
Top Overlay:
  lines w0.254: 10.897,8.509 12.852,8.509 12.852,7.595 14.859,5.588
  text "GND" at 32.1,30.625 h0.75
  text "TX" at 32.1,28.125 h0.75
  text "RX" at 32.1,25.625 h0.75
  text "3V3" at 32.1,23.125 h0.75
  text "3V3" at 32.1,20.125 h0.75
  text "CL" at 32.1,17.625 h0.75
  text "DIO" at 32.1,15.125 h0.75
  text "GND" at 32.1,12.625 h0.75
Top Assembly:
  circle w0.254: c19.132,53.391 r10.036
Board:
  the board outline again, w0.254

## Dimensions
0,65 to 35.001,0 on Graphics
0,65 to 0,0 on Graphics